# Altium PCB ratopus.PcbDoc (part 1 of 3)
Units mm, origin at the board's own origin, x right, y up, seen from the top; angles counter-clockwise.
Board outline 160 x 100 mm, 2 copper layers (Top Layer, Bottom Layer); 132 components, 69 nets, 422 pads, 0 vias.
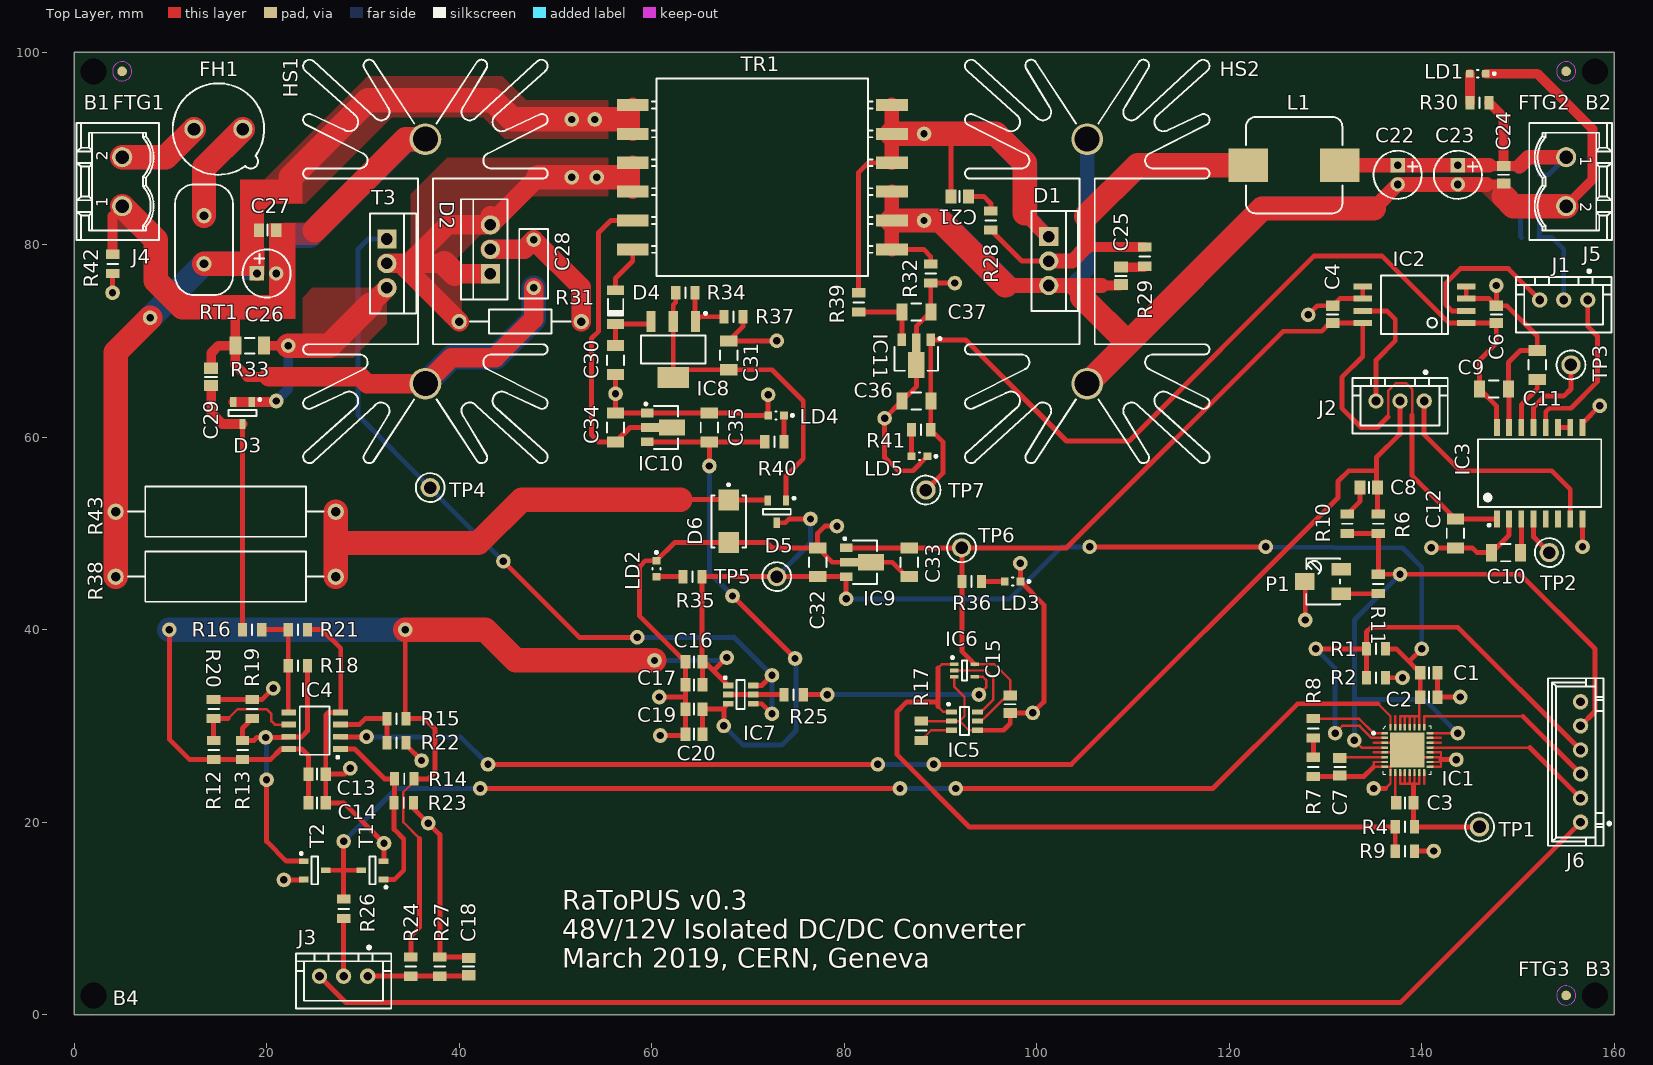
[diagram p0: Top Layer view]
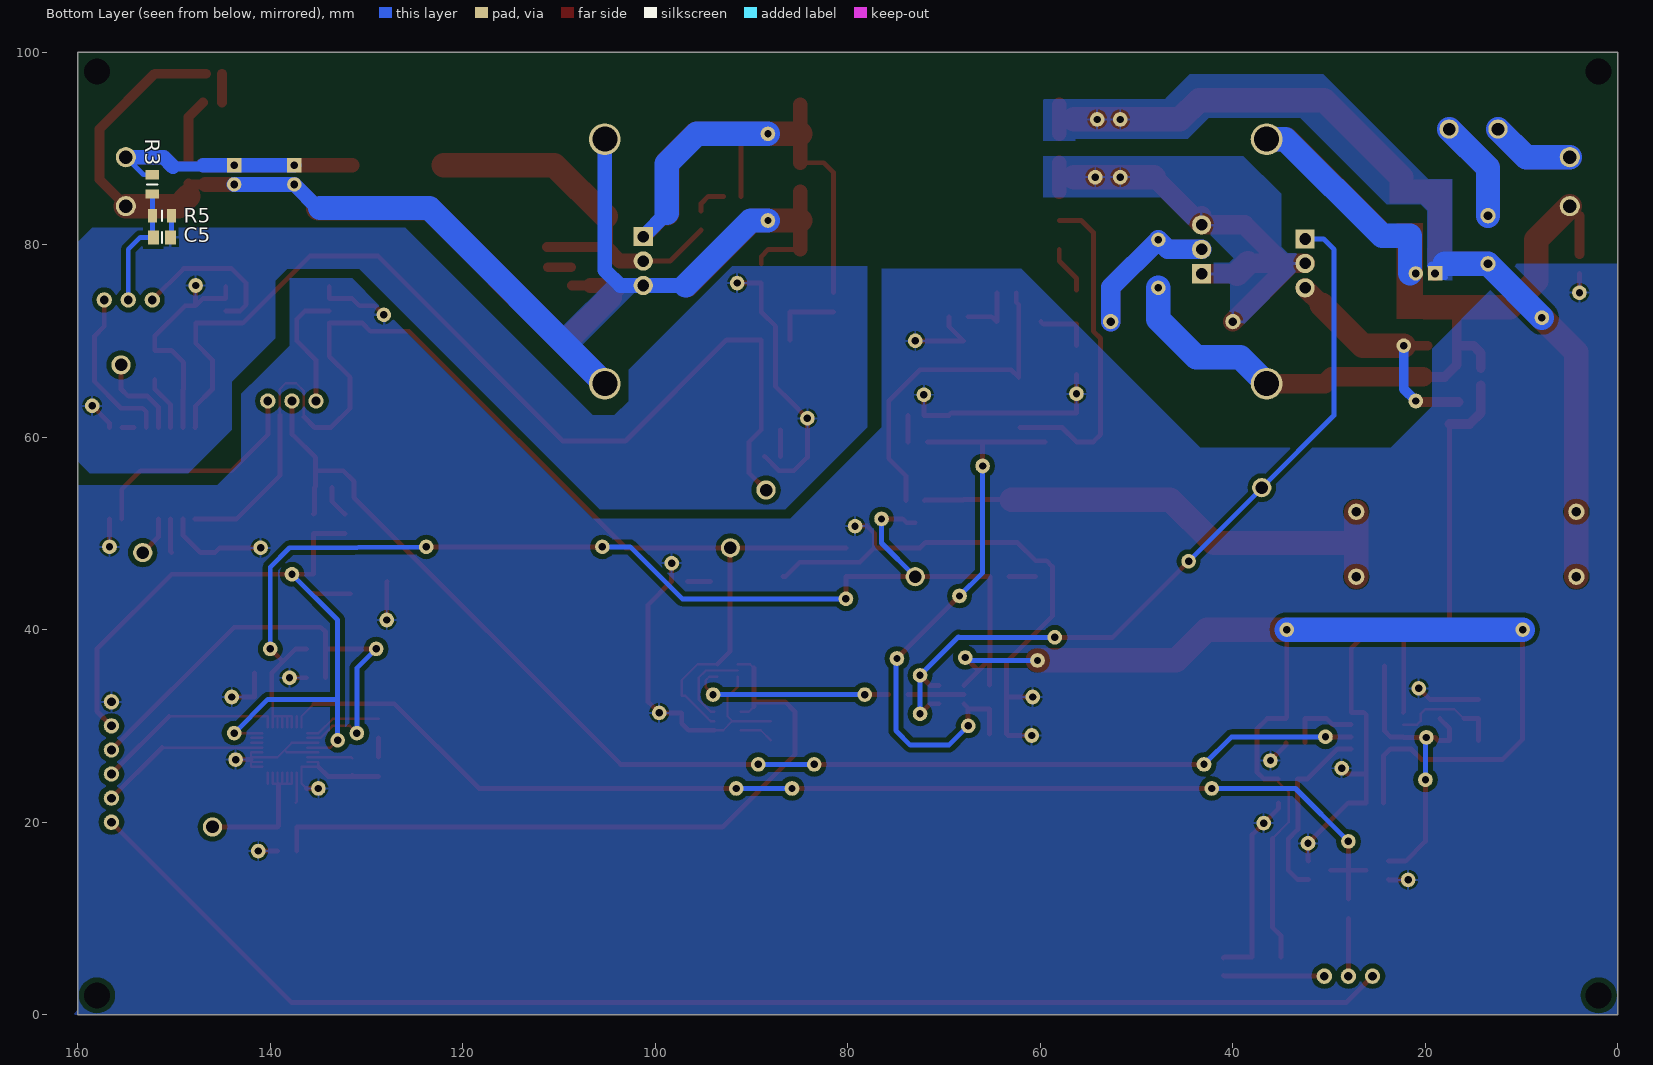
[diagram p1: Bottom Layer view, seen from below]
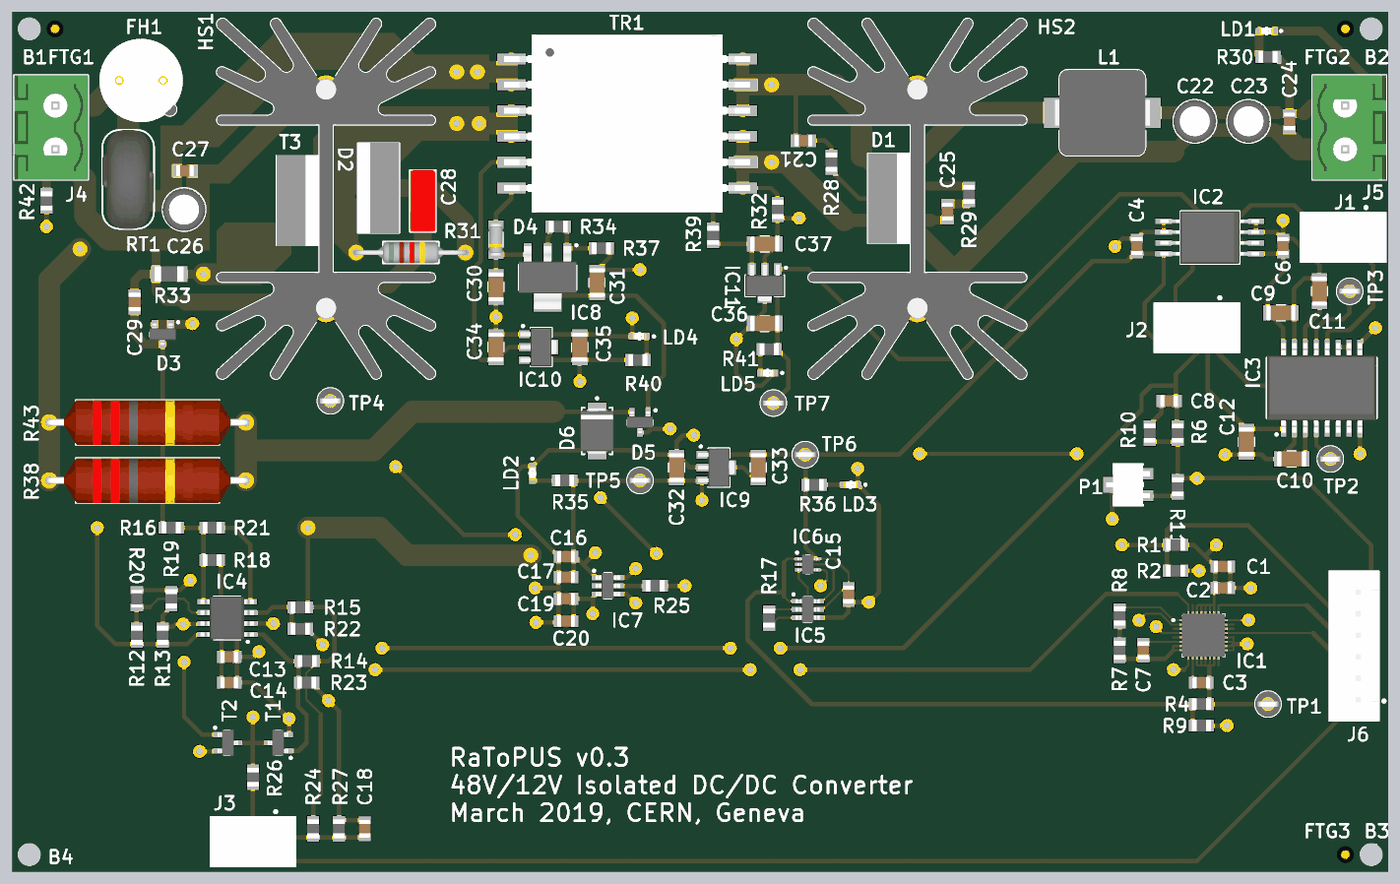
[diagram p3: 3D render of the assembled board from above, using the file's embedded part models]
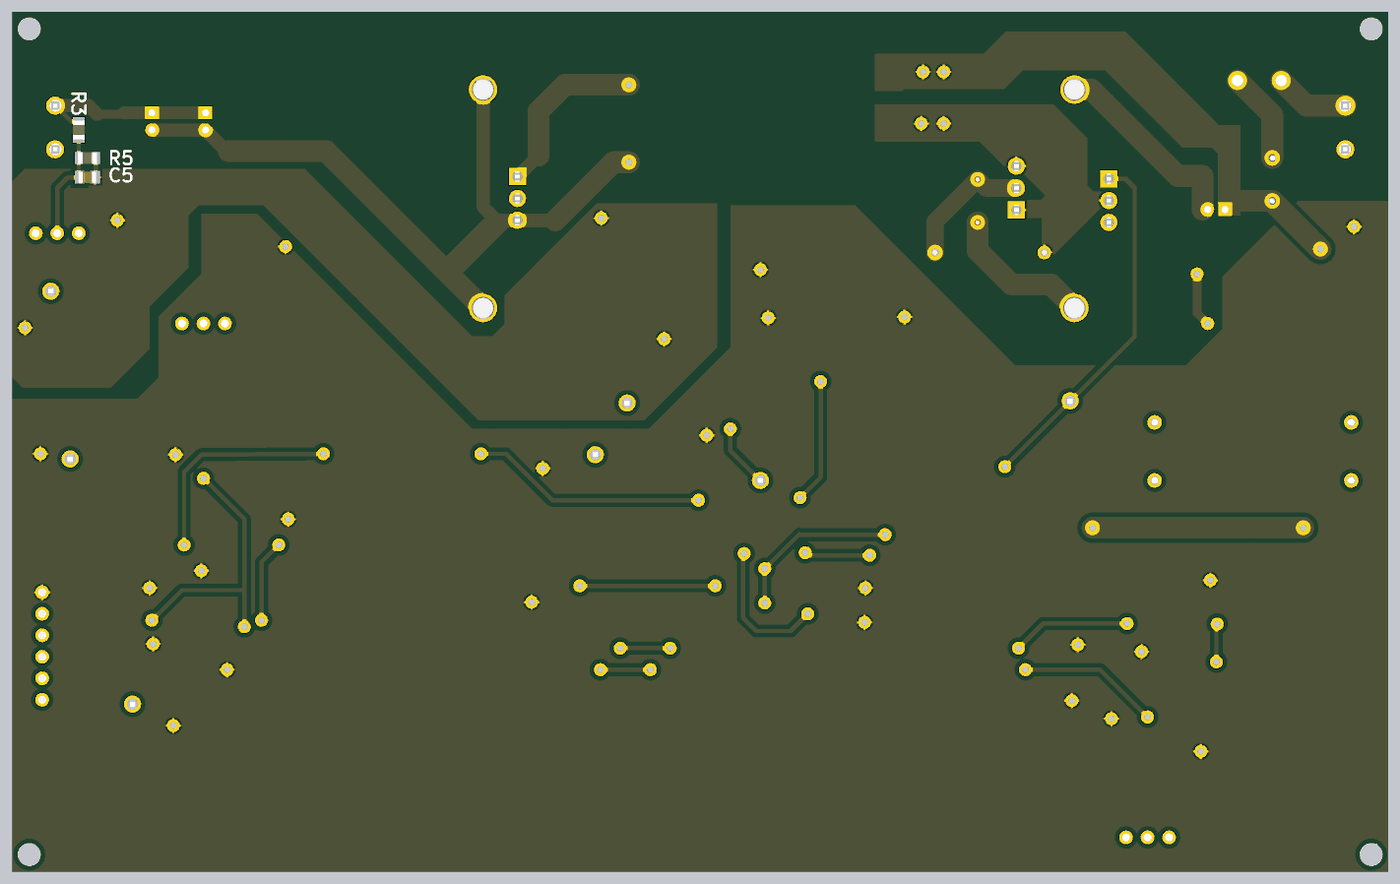
[diagram p4: 3D render of the assembled board from below, using the file's embedded part models]

## Layer stack, top to bottom
Top Solder: solder mask 0.0102, Solder Resist, Dk 3.5
Top Layer: signal copper 0.0356
Dielectric 1: dielectric 0.32, FR-4, Dk 4.8
Bottom Layer: signal copper 0.0356
Bottom Solder: solder mask 0.0102, Solder Resist, Dk 3.5

## Board outline
0,0 160,0 160,100 0,100

## Design rules (kind name [scope] priority, off if disabled: settings)
Clearance [All] p1: gap=0.25 ignorepadtopadclearanceinfootprint=TRUE except(0: Arc-Hole Track-Hole SMDPad-Hole THPad-Hole Via-Hole Fill-Hole Poly-Hole Region-Hole Text-Hole; 0.5: Arc-Poly Track-Poly SMDPad-Poly THPad-Poly Via-Poly Fill-Poly Poly-Poly)
Height [All] p1: minheight=0 maxheight=70 prefheight=12.7
HoleSize [All] p1: absolutevalues=TRUE maxlimit=3 minlimit=0.025 maxpercent=80.000 minpercent=20.000
MinimumSolderMaskSliver [All] p1: minsoldermaskwidth=0.03
PolygonConnect [All] p1: connectstyle=Relief reliefconductorwidth=0.254 reliefentries=4 polygonreliefangle="90 Angle" airgapwidth=0.254
RoutingVias [All] p1: holewidth=0.711 width=1.27 viastyle="Through Hole" minholewidth=0.711 minwidth=1.27 maxholewidth=0.711 maxwidth=1.27
SilkToSilkClearance [All] p1: silktosilkclearance=0.2
SilkToSolderMaskClearance [IsPad] p1: minsilkscreentomaskgap=0.1 clearancetoexposedcopper=TRUE
SolderMaskExpansion [All] p1: expansion=0.102
Width [All] p1: maxlimit=2.54 minlimit=0.25 preferedwidth=0.508 minimp=50.000000 maximp=50.000000 favimp=50.000000
25 further rules are at their usual default settings.

## Classes and differential pairs
component class ratopus: B1 B2 B3 B4 FH1 FTG1 FTG2 FTG3 J4 J5 J6 R42 RT1
component class U_controller: C1 C2 C3 C4 C5 C6 C7 C8 C9 C10 C11 C12 C13 C14 C15 C16 C17 C18 C19 C20 IC1 IC2 IC3 IC4 IC5 IC6 IC7 J1 J2 J3 P1 R1 R2 R3 R4 R5 R6 R7 R8 R9 R10 R11 R12 R13 R14 R15 R16 R17 R18 R19 R20 R21 R22 R23 R24 R25 R26 R27 T1 T2 TP1 TP2 TP3
component class U_power_stage: C21 C22 C23 C24 C25 C26 C27 C28 C29 C30 C31 C32 C33 C34 C35 C36 C37 D1 D2 D3 D4 D5 D6 HS1 HS2 IC8 IC9 IC10 IC11 L1 LD1 LD2 LD3 LD4 LD5 R28 R29 R30 R31 R32 R33 R34 R35 R36 R37 R38 R39 R40 R41 R43 T3 TP4 TP5 TP6 TP7 TR1

## Components (designator, comment, footprint, x,y, rotation, side; value= is the part's Value field where it differs from the comment)
B1 "Non Plated Hole" MTG270 2,98 r0 top
B2 "Non Plated Hole" MTG270 158,98 r0 top
B3 "Non Plated Hole" MTG270 158,2 r0 top
B4 "Non Plated Hole" MTG270 2,2 r0 top
C1 "4.7uF" CAPC2012X135N 140.75,35.5 r180 top
C2 "100nF" CAPC2012X135N 140.75,33 r180 top
C3 "220nF" CAPC2012X135N 138.25,22 r180 top
C4 "100nF" CAPC2012X135N 130.75,72.75 r270 top
C5 "100pF" CAPC2012X88N 151.25,80.75 r0 bottom
C6 "100nF" CAPC2012X135N 147.75,72.75 r270 top
C7 "220nF" CAPC2012X135N 131.5,25.75 r90 top
C8 "33pF" CAPC2012X88N 134.5,54.75 r0 top
C9 "1uF" CAPC3216X140N 147.5,65 r180 top
C10 "1uF" CAPC3216X140N 148.75,48 r0 top
C11 "1uF" CAPC3216X140N 152,67.5 r270 top
C12 "1uF" CAPC3216X140N 143.5,50 r90 top
C13 "100nF" CAPC2012X135N 25.25,25 r180 top
C14 "100nF" CAPC2012X135N 25.25,22 r180 top
C15 "100nF" CAPC2012X135N 97.25,32.25 r90 top
C16 "4.7uF" CAPC2012X135N 64.4,36.65 r0 top
C17 "100nF" CAPC2012X135N 64.4,34.25 r0 top
C18 "100nF" CAPC2012X135N 41,5 r270 top
C19 "4.7uF" CAPC2012X135N 64.4,31.75 r0 top
C20 "100nF" CAPC2012X135N 64.4,29.15 r0 top
C21 "47pF" CAPC2012X88N 92,85 r0 top
C22 "22uF" CAPPR200-500X700 137.5,87.25 r270 top
C23 "22uF" CAPPR200-500X700 143.75,87.25 r270 top
C24 "100nF" CAPC2012X135N 148.5,87.25 r90 top
C25 "47pF" CAPC2012X88N 108.75,76.75 r90 top
C26 "10uF" CAPPR200-500X1100 20,77 r0 top
C27 "100nF" CAPC2012X135N 20.1,81.5 r180 top
C28 "1nF" CAPR500-300X720X750 47.75,78 r90 top
C29 "1nF" CAPC2013X100N 14.25,66.25 r270 top
C30 "1uF" CAPC3216X140N 56.25,68 r90 top
C31 "1uF" CAPC3216X140N 68,68.5 r270 top
C32 "1uF" CAPC3216X140N 77.25,47 r270 top
C33 "1uF" CAPC3216X140N 86.75,47 r90 top
C34 "1uF" CAPC3216X140N 56.25,61 r90 top
C35 "1uF" CAPC3216X140N 66,61 r270 top
C36 "1uF" CAPC3216X140N 87.5,63.75 r0 top
C37 "1uF" CAPC3216X140N 87.5,73 r180 top
D1 "MBR20200CT" TO-220-V 101.25,78.29 r270 top
D2 "MBR10200CT" TO-220-V 43.25,79.5 r90 top
D3 "BAT54C" SOT95P240X130-3N 17.5,62.5 r270 top
D4 "PMLL4148L" DIOMELF3515N 56.25,73.5 r90 top
D5 "BAT54C" SOT95P240X130-3N 73,52.25 r270 top
D6 "1SMB5924BT3G" DIOM5436X244N 68,51.25 r270 top
FH1 "Fuse Holder" FUSH_SCHURTER_0031.7601 15,92 r0 top
FTG1 "Use only in PCB" FIDUCIAL_TOP_C100-200 5,98 r90 top
FTG2 "Use only in PCB" FIDUCIAL_TOP_C100-200 155,98 r90 top
FTG3 "Use only in PCB" FIDUCIAL_TOP_C100-200 155,2 r90 top
HS1 "Heat Sink 2 Pads" HSINK_AAVID-THERMALLOY_530002B02500G_v 36.5,78.25 r90 top
HS2 "Heat Sink 2 Pads" HSINK_AAVID-THERMALLOY_530002B02500G_v 105.25,78.25 r90 top
IC1 "CERN_FEAST2.1" CERN_FEAST2.1 138.5,27.5 r0 top
IC2 "ACPL-C87B-000E" AVAGO_ACPL-C87B 139.25,73.75 r180 top
IC3 "ADuM4190ARIZ" SOIC127P1031X264-16N 152.25,56.25 r90 top
IC4 "LM293D" SOIC127P600X175-8N 25,29.5 r180 top
IC5 "LTC6993CS6-1#TRPBF" SOT95P280X100-6N 92.5,30.5 r0 top
IC6 "74AHC1G08GW" SOT65P212X110-5N 92.5,35.75 r0 top
IC7 "ZXGD3003E6TA" SOT95P285X140-6N 69.25,33.25 r0 top
IC8 "LM317EMP" SOT230P700X180-4N 62.25,69.1 r270 top
IC9 "L78L05ACUTR" SOT89 82.165,47 r0 top
IC10 "L79L05ACUTR" SOT89 61.5,61 r0 top
IC11 "L78L05ACUTR" SOT89 87.5,68.135 r270 top
J1 "Header 3" JST_B3B-XH-A(LF)(SN) 154.75,74.25 r180 top
J2 "Header 3" JST_B3B-XH-A(LF)(SN) 137.75,63.75 r180 top
J3 "Header 3" JST_B3B-XH-A(LF)(SN) 28,4 r180 top
J4 "Family" PHOENIX_1755736 5,86.54 r90 top
J5 "Family" PHOENIX_1755736 155,86.54 r270 top
J6 "Header 6" JST_B6B-XH-A(LF)(SN) 156.5,26.25 r90 top
L1 "10uH" IND_BOURNS_SRP1038A 126.75,88.25 r0 top
LD1 "Blue" LED_KINGBRIGHT_KPH-1608QBC-D 145.825,97.75 r180 top
LD2 "Green" LED_KINGBRIGHT_KPH-1608CGCK 60.5,46.325 r270 top
LD3 "Green" LED_KINGBRIGHT_KPH-1608CGCK 97.5,45 r180 top
LD4 "Green" LED_KINGBRIGHT_KPH-1608CGCK 72.925,62.25 r180 top
LD5 "Blue" LED_KINGBRIGHT_KPH-1608QBC-D 87.825,58 r180 top
P1 "100k" TRIM_VISHAY_TSM4YL 129.75,45 r90 top
R1 "220k" RESC2012X60N 135.25,38 r0 top
R2 "100k" RESC2012X60N 135.25,35 r180 top
R3 "18k" RESC2012X60N 152.25,86.25 r90 bottom
R4 "10k" RESC2012X60N 138.25,19.5 r180 top
R5 "3k3" RESC2012X60N 151.25,83 r0 bottom
R6 "1M" RESC2012X60N 135.5,51 r90 top
R7 "220k" RESC2012X60N 128.75,25.75 r90 top
R8 "390k" RESC2012X60N 128.75,29.75 r90 top
R9 "10k" RESC2012X60N 138.25,17 r180 top
R10 "3k3" RESC2012X60N 132.25,51 r90 top
R11 "390k" RESC2012X60N 135.5,44.75 r270 top
R12 "68k" RESC2012X60N 14.5,27.5 r270 top
R13 "20k" RESC2012X60N 17.5,27.5 r270 top
R14 "20k" RESC2012X60N 34.3,24.5 r0 top
R15 "33k" RESC2012X60N 33.5,30.75 r0 top
R16 "220k" RESC2012X60N 18.5,40 r0 top
R17 "59k" RESC2012X60N 88,29.5 r270 top
R18 "10M" RESC2012X60N 23.25,36.25 r0 top
R19 "10k" RESC2012X60N 18.5,31.75 r270 top
R20 "2k" RESC2013X64N 14.5,31.75 r270 top
R21 "220k" RESC2012X60N 23.25,40 r180 top
R22 "9k1" RESC2012X60N 33.5,28.25 r180 top
R23 "10k" RESC2012X60N 34.25,22 r180 top
R24 "220k" RESC2012X60N 35,5 r90 top
R25 "180" RESC2012X60N 74.75,33.25 r180 top
R26 "10k" RESC2012X60N 28,11 r90 top
R27 "100k" RESC2012X60N 38,5 r270 top
R28 "33" RESC2012X60N 95.25,82.5 r270 top
R29 "33" RESC2012X60N 111.25,78.75 r90 top
R30 "820" RESC2012X60N 146,94.75 r0 top
R31 "15" RES1270-650X250 46.35,72 r0 top
R32 "0" RESC2012X60N 89,77 r90 top
R33 "0R05" RESC3216X80N 18.25,69.5 r0 top
R34 "680" RESC2012X60N 63.5,75 r180 top
R35 "820" RESC2012X60N 64.25,45.5 r0 top
R36 "330" RESC2012X60N 93.25,45 r180 top
R37 "4k7" RESC2012X60N 68.5,72.5 r180 top
R38 "680" RES2286-1670X520 15.75,45.5 r0 top
R39 "1k" RESC2012X60N 81.5,74 r270 top
R40 "330" RESC2012X60N 72.75,59.5 r180 top
R41 "100" RESC2012X60N 88,60.75 r0 top
R42 "0" RESC2012X60N 4,78 r90 top
R43 "680" RES2286-1670X520 15.75,52.25 r0 top
RT1 "10R" THERM_TDK_B57236S0 13.5,80.5 r270 top
T1 "BSH103" SOT95P230X110-3N 31,15 r180 top
T2 "BSH103" SOT95P230X110-3N 25,15 r0 top
T3 "IRF634" TO-220-V 32.5,78.04 r270 top
TP1 "Test Point" VERO_20-2136 146,19.5 r0 top
TP2 "Test Point" VERO_20-2136 153.25,48 r0 top
TP3 "Test Point" VERO_20-2136 155.5,67.5 r0 top
TP4 "Test Point" VERO_20-2136 37,54.75 r0 top
TP5 "Test Point" VERO_20-2136 73,45.5 r0 top
TP6 "Test Point" VERO_20-2136 92.2,48.5 r0 top
TP7 "Test Point" VERO_20-2136 88.5,54.5 r0 top
TR1 "2:1:1" XFMR_COILCRAFT_POE600F 71.5,87 r0 top

## Footprints (in the part's own frame and the unit in brackets; to place one, negate y for a bottom-side part, rotate by r counter-clockwise, add the part's x,y. Pads: shape width x height; smd on the part's side, far side on the other; paste and mask are expansions set on the pad)
AVAGO_ACPL-C87B [mm] "8-Leads Stretched Surface Mount SO Package, Body 6.807x5.859mm, Pitch 1.27mm"
  rect 1.905x0.64 smd: 1(-5.372,1.905) 2(-5.372,0.635) 3(-5.372,-0.635) 4(-5.372,-1.905) 5(5.373,-1.905) 6(5.373,-0.635) 7(5.373,0.635) 8(5.373,1.905)
  silkscreen extent -3.47,-3.05 3.47,3.05, body extent -5.75,-3.05 5.75,3.05, height 3.61
CAPC2012X88N [mm] "Chip Capacitor, Body 2.0x1.25mm, IPC Medium Density"
  rect 1.15x1.45 smd: 1(-0.9,0) 2(0.9,0)
  silkscreen extent 0,-0.58 0,0.58, body extent -1.05,-0.67 1.05,0.68, height 0.9
CAPC2012X135N [mm] "Chip Capacitor, Body 2.0x1.25mm, IPC Medium Density"
  rect 1.05x1.4 smd: 1(-0.9,0) 2(0.9,0)
  silkscreen extent 0,-0.58 0,0.58, body extent -1.05,-0.67 1.05,0.68, height 1.25
CAPC2013X100N [mm] "Capacitor, Non-Polarized, Chip; 2.00mm L X 1.25mm W X 0.9mm H, IPC Medium Density"
  rect 1.15x1.45 smd: 1(-0.9,0) 2(0.9,0)
  silkscreen extent 0,-0.63 0,0.63, body extent -1.1,-0.72 1.1,0.73, height 1
CAPC3216X140N [mm] "Chip Capacitor, Body 3.2x1.6mm, IPC Medium Density"
  rect 1.15x1.8 smd: 1(-1.5,0) 2(1.5,0)
  silkscreen extent -0.5,-0.9 0.5,0.9, body extent -1.7,-0.9 1.7,0.9, height 1.4
CAPPR200-500X700 [mm] "Capacitor, Radial, Pin spacing 2.0mm - Body Diameter 5.0mm X Body Height 7mm"
  rect 1.5x1.5 hole 0.8: 1(-1,0)
  round 1.5 hole 0.8: 2(1,0)
  silkscreen extent -2.5,-2.5 2.5,2.5, body extent -2.51,-2.51 2.49,2.49, height 7
CAPPR200-500X1100 [mm] "Capacitor, Radial, Pin spacing 2.0mm - Body Diameter 5.0mm X Body Height 11mm"
  rect 1.5x1.5 hole 0.8: 1(-1,0)
  round 1.5 hole 0.8: 2(1,0)
  silkscreen extent -2.5,-2.5 2.5,2.5, body extent -2.51,-2.51 2.49,2.49, height 10.9
CAPR500-300X720X750 [mm] "Capacitor Radial, Pin spacing 5.0mm - Body With 3.0mm X Body Length 7.2mm X Body Height 7.5mm"
  round 1.5 hole 0.8: 1(-2.5,0) 2(2.5,0)
  silkscreen extent -3.6,-1.5 3.6,1.5, body extent -3.6,-1.5 3.6,1.5, height 7.5
CERN_FEAST2.1 [mm] "QFN, 0.50mm Pitch, Square; 8 Pin X 8 Pin, 5mm X 5mm X 0.9mm H Body (w/Thermal Tab 3.6 X 3.6mm)"
  rrect30% 0.7x0.25 smd: 1(-2.35,1.75) 2(-2.35,1.25) 3(-2.35,0.75) 4(-2.35,0.25) 5(-2.35,-0.25) 6(-2.35,-0.75) 7(-2.35,-1.25) 8(-2.35,-1.75) 17(2.35,-1.75) 18(2.35,-1.25) 19(2.35,-0.75) 20(2.35,-0.25) 21(2.35,0.25) 22(2.35,0.75) 23(2.35,1.25) 24(2.35,1.75)
  rrect30% 0.25x0.7 smd: 9(-1.75,-2.35) 10(-1.25,-2.35) 11(-0.75,-2.35) 12(-0.25,-2.35) 13(0.25,-2.35) 14(0.75,-2.35) 15(1.25,-2.35) 16(1.75,-2.35) 25(1.75,2.35) 26(1.25,2.35) 27(0.75,2.35) 28(0.25,2.35) 29(-0.25,2.35) 30(-0.75,2.35) 31(-1.25,2.35) 32(-1.75,2.35)
  rect 3.6x3.6 smd: 33(0,0)
  silkscreen extent -3.62,-2.5 2.5,2.5, body extent -2.5,-2.5 2.5,2.5, height 0.9
DIOM5436X244N [mm] "DO-214-AA/SMB Diode, Molded Body; 5.40mm L X 3.62mm W X 2.44mm H, IPC Medium Density"
  rect 2.2x2.15 smd: 1(-2.2,0) 2(2.2,0)
  silkscreen extent -3.92,-1.8 2.7,1.8, body extent -2.7,-1.95 2.7,1.95, height 2.44
DIOMELF3515N [mm] "SOD80C, MELF Diode, 2-Leads, Body 3.5x1.5mm, IPC Medium Density"
  rect 1x1.75 smd: 1(-1.75,0) 2(1.75,0)
  silkscreen extent -0.85,-0.8 0.85,0.8, body extent -1.85,-0.8 1.85,0.8, height 1.6
FIDUCIAL_TOP_C100-200 [mm] "Round Fiducial Target, Top Layer, 1.0mm, Top Solder 2.0mm, Keepout =2.0mm"
  round 1 smd paste-0.51 mask+0.5: FTG2(0,0)
  Top Layer keep-out circle w0.1: c0,0 r1
FUSH_SCHURTER_0031.7601 [mm] "Vertical Fuse Holder For D8.5x H 8.5mm Subminiature Fuses"
  round 2 hole 1.3: 1(-2.54,0) 2(2.54,0)
  silkscreen extent -4.75,-4.75 4.75,4.75, body extent -4.75,-4.75 4.75,4.75, height 4.4
HSINK_AAVID-THERMALLOY_530002B02500G_v [mm] "TO-220, Extruded Heatsinks Rth: 2.6K/W  - Vertical Mount - Height 63.5mm"
  round 3.3 hole 2.6: 1(-12.7,0) 2(12.7,0)
  silkscreen extent -20.96,-12.7 20.96,12.7, body extent -20.95,-12.7 20.95,12.7, height 63.5
IND_BOURNS_SRP1038A [mm] "SMD Inductor Body Width 10mm Body Lenght 10mm Height 4mm"
  rect 4.1x3.5 smd: 1(-4.75,0) 2(4.75,0)
  silkscreen extent -5,-5 5,5, body extent -5.5,-5 5.5,5, height 4
JST_B3B-XH-A(LF)(SN) [mm] "2.5mm Pitch, 3 Contacts Top Entry Type Shrouded Header"
  round 1.6 hole 0.9: 1(-2.5,0) 2(0,0) 3(2.5,0)
  silkscreen extent -4.95,-3.13 4.95,3.38, body extent -4.95,-2.37 4.95,3.38, height 7
JST_B6B-XH-A(LF)(SN) [mm] "2.5mm Pitch, 6 Contacts Top Entry Type Shrouded Header"
  round 1.6 hole 0.9: 1(-6.25,0) 2(-3.75,0) 3(-1.25,0) 4(1.25,0) 5(3.75,0) 6(6.25,0)
  silkscreen extent -8.7,-3.13 8.7,3.38, body extent -8.7,-2.37 8.7,3.38, height 7
LED_KINGBRIGHT_KPH-1608CGCK [mm] "SMT Green LED, Case 0603, Body L 1.6 x W 0.8mm H 0.65mm"
  rect 0.8x0.8 smd: 1(-0.825,0) 2(0.825,0)
  silkscreen extent -1.82,-0.4 0.08,0.4, body extent -0.8,-0.4 0.8,0.4, height 0.65
LED_KINGBRIGHT_KPH-1608QBC-D [mm] "SMT Blue LED, Case 0603, Body L 1.6 x W 0.8mm H 0.65mm"
  rect 0.8x0.8 smd: 1(-0.825,0) 2(0.825,0)
  silkscreen extent -1.83,-0.4 0.08,0.4, body extent -0.8,-0.4 0.8,0.4, height 0.65
MTG270 [mm] "Non Plated Through Hole: Hole Dia.=2.7mm"
  round 0.5 hole 2.7 unplated mask+1.1: 1(0,0)
PHOENIX_1755736 [mm] "PCB Header, 12A 250 V, Pitch: 2.54mm, 2 Positions, MSTBVA Serie"
  round 2.1 hole 1.4: 1(-2.54,0) 2(2.54,0)
  silkscreen extent -6.08,-3.84 6.08,4.77, body extent -6.08,-3.83 6.08,4.77, height 12
RES1270-650X250 [mm] "Resistor, Axial, Pad spacing 10.16 mm - Body Lengh 6.6mm X Body Diameter 2.5mm"
  round 1.6 hole 0.9: 1(-6.35,0) 2(6.35,0)
  silkscreen extent -5.2,-1.25 5.2,1.25, body extent -6.65,-1.25 6.65,1.25, height 2.5
RES2286-1670X520 [mm] "Resistor, Axial, Pad spacing 22.86 mm - Body Lengh 16.7mm X Body Diameter 5.2mm"
  round 1.7 hole 1: 1(-11.43,0) 2(11.43,0)
  silkscreen extent -10.16,-2.6 10.16,2.6, body extent -11.82,-2.6 11.82,2.6, height 5.2
RESC2012X60N [mm] "Chip Resistor, EIA 0805, Metric 2012, Body 2.0x1.2mm, IPC Medium Density"
  rect 0.95x1.4 smd: 1(-1,0) 2(1,0)
  silkscreen extent 0,-0.55 0,0.55, body extent -1.1,-0.67 1.1,0.68, height 0.6
RESC2013X64N [mm] "Chip Resistor, EIA 0805, Metric 2013, Body 2.03x1.27mm, IPC Medium Density"
  rect 0.95x1.45 smd: 1(-1,0) 2(1,0)
  silkscreen extent 0,-0.55 0,0.55, body extent -1.02,-0.63 1.02,0.64, height 0.64
RESC3216X80N [mm] "Chip Resistor, EIA 1206, Metric 3216, Body 3.2x1.6mm, IPC Medium Density"
  rect 1.25x1.85 smd: 1(-1.5,0) 2(1.5,0)
  silkscreen extent -0.5,-0.8 0.5,0.8, body extent -1.67,-0.87 1.68,0.88, height 0.8
SOIC127P600X175-8N [mm] "SOIC 8, Pitch 1.27mm - Body 4x5mm, IPC Medium Density"
  rect 1.55x0.6 smd: 1(-2.7,1.905) 2(-2.7,0.635) 3(-2.7,-0.635) 4(-2.7,-1.905) 5(2.7,-1.905) 6(2.7,-0.635) 7(2.7,0.635) 8(2.7,1.905)
  silkscreen extent -2.53,-2.5 1.55,2.88, body extent -3.1,-2.5 3.1,2.5, height 1.75
SOIC127P1031X264-16N [mm] "SOIC, 1.27mm Pitch;16 Pin, 7.49mm W X 10.21mm L X 2.64mm H body, IPC Medium Density"
  rect 1.8x0.6 smd: 1(-4.75,4.445) 2(-4.75,3.175) 3(-4.75,1.905) 4(-4.75,0.635) 5(-4.75,-0.635) 6(-4.75,-1.905) 7(-4.75,-3.175) 8(-4.75,-4.445) 9(4.75,-4.445) 10(4.75,-3.175) 11(4.75,-1.905) 12(4.75,-0.635) 13(4.75,0.635) 14(4.75,1.905) 15(4.75,3.175) 16(4.75,4.445)
  silkscreen extent -5.52,-6.4 3.52,6.4, body extent -5.21,-6.37 5.21,6.38, height 2.65
SOT65P212X110-5N [mm] "SOT353, SOT, 0.65mm Pitch, 5 pin, 1.25mm W X 2.05mm L X 1.10mm H, IPC Medium Density"
  rect 0.9x0.4 smd: 1(-1.05,0.65) 2(-1.05,0) 3(-1.05,-0.65) 4(1.05,-0.65) 5(1.05,0.65)
  silkscreen extent -1.37,-1.05 0.28,1.47, body extent -1.2,-1.1 1.2,1.1, height 1.1
SOT89 [mm] "SOT89-3, 3-Leads, Body 2.48x4.5mm"
  rect 1.3x0.9 smd: 1(-1.965,1.5) 3(-1.965,-1.5)
  rect 1.9x0.9 smd: 2(-1.665,0)
  rect 2.7x1.7 smd: 2(0.635,0)
  silkscreen extent -2.22,-2.25 1.24,2.57, body extent -2.44,-2.25 1.81,2.25, height 1.6
SOT95P230X110-3N [mm] "SOT23, 3 pin, Pitch 0.95mm - 1.3mm W X 2.9mm L X 1.1mm H, IPC Medium Density"
  rect 1x0.6 smd: 1(-1.15,0.95) 2(-1.15,-0.95) 3(1.15,0)
  silkscreen extent -1.53,-1.45 0.33,1.87, body extent -1.08,-1.5 1.25,1.5, height 1.1
SOT95P240X130-3N [mm] "SOT23 3-Leads, Pitch 0.95mm - Body 1.3x2.9mm, IPC Medium Density"
  rect 1.05x0.65 smd: 1(-1.15,0.95) 2(-1.15,-0.95) 3(1.15,0)
  silkscreen extent -1.52,-1.45 0.3,1.92, body extent -1.25,-1.5 1.25,1.5, height 1.3
SOT95P280X100-6N [mm] "SOT23, 0.95mm pitch; 6 pin, 1.625mm W X 2.90mm L X 1.00mm H body, IPC Medium Density"
  rect 1.1x0.55 smd: 1(-1.35,0.95) 2(-1.35,0) 3(-1.35,-0.95) 4(1.35,-0.95) 5(1.35,0) 6(1.35,0.95)
  silkscreen extent -1.77,-1.45 0.48,1.87, body extent -1.4,-1.5 1.4,1.5, height 1
SOT95P285X140-6N [mm] "SOT23, 0.95mm Pitch; 6 Pin, 1.60mm W X 3.00mm L X 1.40mm H Body, IPC Medium Density"
  rect 1.1x0.6 smd: 1(-1.3,0.95) 2(-1.3,0) 3(-1.3,-0.95) 4(1.3,-0.95) 5(1.3,0) 6(1.3,0.95)
  silkscreen extent -1.72,-1.5 0.43,1.87, body extent -1.42,-1.5 1.43,1.5, height 1.4
SOT230P700X180-4N [mm] "SOT223, 2.30mm pitch; 3 pin, 3.70mm W X 6.70mm L, IPC Medium Density"
  rect 2.15x0.95 smd: 1(-2.9,2.3) 2(-2.9,0) 3(-2.9,-2.3)
  rect 2.15x3.25 smd: 4(2.9,0)
  silkscreen extent -3.87,-3.35 1.45,3.48, body extent -3.65,-3.35 3.65,3.35, height 1.81
THERM_TDK_B57236S0 [mm] "NTC thermistors for Inrush Current Limiting, Body  D 11.5mm x W 6mm x H 16mm"
  round 1.6 hole 0.9: 1(-2.5,0) 2(2.5,0)
  silkscreen extent -5.75,-3 5.75,3, body extent -5.75,-3 5.75,3, height 16
TO-220-V [mm] "TO-220 3-Terminal - Vertical Mount"
  rect 2x2 hole 1.2: 1(-2.54,0)
  round 2 hole 1.2: 2(0,0) 3(2.54,0)
  silkscreen extent -5.21,-1.78 5.21,3.05, body extent -5.27,-1.75 5.27,2.95, height 20.5
TRIM_VISHAY_TSM4YL [mm] "W 3.5 x L 4.8 x H 5.3mm Trimming Potentiometer Serie TSM4YL"
  rect 1.3x2 smd: 1(-1.27,-1.9) 3(1.27,-1.9)
  rect 1.8x2 smd: 2(0,1.9)
  silkscreen extent -2.4,-1.75 2.4,1.75, body extent -2.4,-2.55 2.4,2.55, height 5.1
VERO_20-2136 [mm] "Black Bead PCB Terminal Test Pin (1.32 mm hole)"
  round 2 hole 1.3: 1(0,0)
  silkscreen extent -1.5,-1.5 1.5,1.5, body extent -1.5,-1.5 1.5,1.5, height 5.4
XFMR_COILCRAFT_POE600F [mm] "60 W PoE Transformer, Body  20.57 x 21.96mm"
  rect 3.3x1.27 smd: 1(-13.46,7.5) 2(-13.46,4.5) 3(-13.46,1.5) 4(-13.46,-1.5) 5(-13.46,-4.5) 6(-13.46,-7.5) 7(13.46,-7.5) 8(13.46,-4.5) 9(13.46,-1.5) 10(13.46,1.5) 11(13.46,4.5) 12(13.46,7.5)
  silkscreen extent -11.46,-10.25 11.46,10.26, body extent -14.32,-10.28 14.33,10.29, height 11.43

## Part data
B1 B2 B3 B4: library part NON-PLATED_HOLE2.7, "Single Terminal Socket", Author="CERN DEM BC", ComponentHeight=0mm, Component Type="Standard (No BOM)", CreateDate=11/11/2015, Family="Non Plated Hole", HelpURL=Undefined, LatestRevisionDate=11/11/2015, Mounted=No, PackageDescription="Non Plated Through Hole: Hole Dia.=2.7mm", Part Description="Non Plated Through Hole: Hole Dia.=2.7mm", Part Number=NON-PLATED_HOLE2.7, Pin Count=1, Sense=No, SMD=No, Socket=No, Status=None
C1 C16 C19: library part CC0805_4.7UF_16V_10%_X7R, "Non-polarised capacitor", Case=0805, Manufacturer=GENERIC, Manufacturer1 ComponentHeight=1.35mm, Manufacturer1 Example="TAIYO YUDEN", Manufacturer1 Part Number=EMK212B7475KG-T, Tolerance=±10%, Voltage=16V, Author="CERN DEM JLC", Component Type=Standard, CreateDate=16/09/2014, HelpURL=\\cern.ch\dfs\Applications\Altium\Datasheets\CC0805_X7R_TAIYO-YUDEN_HIGH-VALUE.pdf, LatestRevisionDate=16/09/2014, Manufacturer Part Number=CC0805_4.7UF_16V_10%_X7R, Mounted=Yes, Part Description="SMD Multilayer Chip Ceramic Capacitor", Part Number=CC0805_4.7UF_16V_10%_X7R, Pin Count=2, Sense=No, SMD=Yes, Socket=No, Status=Preferred, TC=X7R
C2 C4 C6 C13 C14 C15 C17 C18 C20 C24 C27: library part CC0805_100NF_50V_10%_X7R, "Non-polarised capacitor", Case=0805, Manufacturer=GENERIC, Manufacturer1 ComponentHeight=1mm, Manufacturer1 Example=TDK, Manufacturer1 Part Number=C2012X7R1H104K085AA, Tolerance=±10%, Voltage=50V, Author="CERN DEM JLC", Component Type=Standard, CreateDate=03/12/2007, HelpURL=\\cern.ch\dfs\Applications\Altium\Datasheets\CC0805_X7R_TDK_C.pdf, LatestRevisionDate=22/04/2015, Manufacturer Part Number=CC0805_100NF_50V_10%_X7R, Mounted=Yes, Part Description="SMD Multilayer Chip Ceramic Capacitor", Part Number=CC0805_100NF_50V_10%_X7R, Pin Count=2, Sense=No, SMD=Yes, Socket=No, Status=Preferred, TC=X7R
C3 C7: library part CC0805_220NF_50V_10%_X7R, "Non-polarised capacitor", Case=0805, Manufacturer=GENERIC, Manufacturer1 ComponentHeight=1.35mm, Manufacturer1 Example=MURATA, Manufacturer1 Part Number=GRM21BR71H224KA01L, Tolerance=±10%, Voltage=50V, Author="CERN DEM JLC", Component Type=Standard, CreateDate=03/12/2007, HelpURL=\\cern.ch\dfs\Applications\Altium\Datasheets\CC0805_X7R_MURATA.pdf, LatestRevisionDate=03/12/2007, Manufacturer Part Number=CC0805_220NF_50V_10%_X7R, Mounted=Yes, Part Description="SMD Multilayer Chip Ceramic Capacitor", Part Number=CC0805_220NF_50V_10%_X7R, Pin Count=2, Sense=No, SMD=Yes, Socket=No, Status=Preferred, TC=X7R
C5: library part CC0805_100PF_50V_5%_C0G_KEMET_C0805C101J5GACAUTO, "Non-polarised capacitor", Case=0805, Manufacturer=KEMET, Manufacturer Part Number=C0805C101J5GACAUTO, Tolerance=±5%, Voltage=50V, Author="CERN DEM BC", ComponentHeight=0.88mm, Component Type=Standard, CreateDate=26/02/2016, HelpURL=\\cern.ch\dfs\Applications\Altium\Datasheets\CC0805_KEMET_C0805C101J5GACAUTO.pdf, LatestRevisionDate=26/02/2016, Mounted=Yes, Part Description="SMD Multilayer Chip Ceramic Capacitor (Automotive Grade)", Part Number=CC0805_100PF_50V_5%_C0G_KEMET_C0805C101J5GACAUTO, Pin Count=2, Sense=No, SMD=Yes, Socket=No, Status="Not Recommended", TC=C0G/NP0
C8: library part CC0805_33PF_50V_5%_C0G_KEMET_C0805C330J5GACAUTO, "Non-polarised capacitor", Case=0805, Manufacturer=KEMET, Manufacturer Part Number=C0805C330J5GACAUTO, Tolerance=±5%, Voltage=50V, Author="CERN DEM BC", ComponentHeight=0.88mm, Component Type=Standard, CreateDate=29/02/2016, HelpURL=\\cern.ch\dfs\Applications\Altium\Datasheets\CC0805_KEMET_C0805C330J5GACAUTO.pdf, LatestRevisionDate=29/02/2016, Mounted=Yes, Part Description="SMD Multilayer Chip Ceramic Capacitor (Automotive Grade)", Part Number=CC0805_33PF_50V_5%_C0G_KEMET_C0805C330J5GACAUTO, Pin Count=2, Sense=No, SMD=Yes, Socket=No, Status="Not Recommended", TC=CG0/NP0
C9 C10 C11 C12 C30 C31 C32 C33 C34 C35 C36 C37: library part CC1206_1UF_50V_10%_X7R, "Non-polarised capacitor", Case=1206, Manufacturer=GENERIC, Manufacturer1 ComponentHeight=1.8mm, Manufacturer1 Example=KEMET, Manufacturer1 Part Number=C1206F105K5RACTU, Tolerance=±10%, Voltage=50V, Author="CERN DEM JLC", Component Type=Standard, CreateDate=07/11/2012, HelpURL=\\cern.ch\dfs\Applications\Altium\Datasheets\CC1206_X7R_KEMET_OPENMODE.pdf, LatestRevisionDate=07/11/2012, Manufacturer Part Number=CC1206_1UF_50V_10%_X7R, Mounted=Yes, Part Description="SMD Multilayer Chip Ceramic Capacitor", Part Number=CC1206_1UF_50V_10%_X7R, Pin Count=2, Sense=No, SMD=Yes, Socket=No, Status=Preferred, TC=X7R
C21 C25: library part CC0805_47PF_50V_5%_C0G_KEMET_C0805C470J5GACAUTO, "Non-polarised capacitor", Case=0805, Manufacturer=KEMET, Manufacturer Part Number=C0805C470J5GACAUTO, Tolerance=±5%, Voltage=50V, Author="CERN DEM JLC", ComponentHeight=0.88mm, Component Type=Standard, CreateDate=23/04/2015, HelpURL=\\cern.ch\dfs\Applications\Altium\Datasheets\CC0805_KEMET_C0805C470J5GACAUTO.pdf, LatestRevisionDate=23/04/2015, Mounted=Yes, Part Description="SMD Multilayer Chip Ceramic Capacitor (Automotive Grade)", Part Number=CC0805_47PF_50V_5%_C0G_KEMET_C0805C470J5GACAUTO, Pin Count=2, Sense=No, SMD=Yes, Socket=No, Status="Not Recommended", TC=CG0/NP0
C22 C23: library part CAER_22UF_25V_20%_200-500X700, "Polarised capacitor", Case="LS2 D5 x H7", Manufacturer=GENERIC, Manufacturer1 ComponentHeight=7mm, Manufacturer1 Example=PANASONIC, Manufacturer1 Part Number=EEAFC1E220, Tolerance=±20%, Voltage=25V, Author="CERN DEM JLC", ComponentHeight=7mm, Component Type=Standard, CreateDate=18/12/2007, HelpURL=\\cern.ch\dfs\Applications\Altium\Datasheets\CAER_PANASONIC_FC.pdf, LatestRevisionDate=18/12/2007, Manufacturer Part Number=CAER_22UF_25V_20%_200-500X700, Mounted=Yes, Part Description="Aluminum Electrolytic Capacitor", Part Number=CAER_22UF_25V_20%_200-500X700, Pin Count=2, Sense=No, SMD=No, Socket=No, Status=Preferred
C26: library part CAER_10UF_63V_20%_PANASONIC_ECA1JM100, "Polarised capacitor", Case="LS2 D5 x H11", Manufacturer=PANASONIC, Manufacturer Part Number=ECA1JM100, Tolerance=±20%, Voltage=63V, Author="CERN DEM JLC", ComponentHeight=11mm, Component Type=Standard, CreateDate=04/03/2009, HelpURL=\\cern.ch\dfs\Applications\Altium\Datasheets\CAER_PANASONIC_M.pdf, LatestRevisionDate=04/03/2009, Mounted=Yes, Part Description="Aluminum Electrolytic Capacitor (Series: M Type: A)", Part Number=CAER_10UF_63V_20%_PANASONIC_ECA1JM100, Pin Count=2, Sense=No, SMD=No, Socket=No, Status=None
C28: library part CPPR_1NF_400V_10%_WIMA_MKP2, "Non-polarised capacitor", Case="LS5 W3 x L7.2 x H7.5", Manufacturer=WIMA, Manufacturer Part Number=MKP2G011001B00KSSD, Tolerance=±10%, Voltage=400VDC, Author="CERN DEM MR", ComponentHeight=7.5mm, Component Type=Standard, CreateDate=28/08/2018, HelpURL=\\cern.ch\dfs\Applications\Altium\Datasheets\CPPR_WIMA_MKP2.pdf, LatestRevisionDate=28/08/2018, Mounted=Yes, Part Description="Metallized Polypropylene Film Capacitor (MKP2)", Part Number=CPPR_1NF_400V_10%_WIMA_MKP2, Pin Count=2, Sense=No, SMD=No, Socket=No, Status=None
C29: library part CC0805_1NF_25V_1%_C0G, "Non-polarised capacitor", Case=0805, Manufacturer=GENERIC, Manufacturer1 ComponentHeight=0.88mm, Manufacturer1 Example=KEMET, Manufacturer1 Part Number=C0805C102F3GACTU, Tolerance=±1%, Voltage=25V, Author="CERN DEM JLC", Component Type=Standard, CreateDate=11/03/2015, HelpURL="\\cern.ch\dfs\Applications\Altium\Datasheets\CC0805_C0G_KEMET_(Commercial Grade).pdf", LatestRevisionDate=11/03/2015, Manufacturer Part Number=CC0805_1NF_25V_1%_C0G, Mounted=Yes, Part Description="SMD Multilayer Chip Ceramic Capacitor", Part Number=CC0805_1NF_25V_1%_C0G, Pin Count=2, Sense=No, SMD=Yes, Socket=No, Status=None, TC=C0G/NP0
D1: library part MBR20200CT_v, "Dual Common Cathode Diodes", Case=TO-220-V, Manufacturer="ON SEMICONDUCTOR", Power=20A, Voltage=200V, Author="CERN DEM JLC", Bonding=No, ComponentHeight=19.85mm, Component Type=Standard, CreateDate=09/06/2015, Device=MBR20200CT, HelpURL=\\cern.ch\dfs\Applications\Altium\Datasheets\MBR20200CT.pdf, LatestRevisionDate=09/06/2015, Manufacturer Part Number=MBR20200CT, Mounted=Yes, PackageDescription="TO-220 3-Terminal - Vertical", Part Description="Switch-mode Power Rectifier (Common Cathode)", Part Number=MBR20200CT_v, Pin Count=3, PressFit=No, Sense=No, SMD=No, Socket=No
D2: library part MBR20200CT_v, "Dual Common Cathode Diodes", Case=TO-220-V, Manufacturer="ON SEMICONDUCTOR", Part Number=MBR10200CT_v, Power=20A, Voltage=200V, Author="CERN DEM JLC", Bonding=No, ComponentHeight=19.85mm, Component Type=Standard, CreateDate=09/06/2015, Device=MBR10200CT, HelpURL=\\cern.ch\dfs\Applications\Altium\Datasheets\MBR20200CT.pdf, LatestRevisionDate=09/06/2015, Manufacturer Part Number=MBR10200CT, Mounted=Yes, PackageDescription="TO-220 3-Terminal - Vertical", Part Description="Switch-mode Power Rectifier (Common Cathode)", Pin Count=3, PressFit=No, Sense=No, SMD=No, Socket=No
D3 D5: "Dual Common Cathode Schottky Diodes", Case=SOT23-3, Manufacturer="FAIRCHILD SEMICONDUCTOR", Power=200mA, Voltage=30V, Author="CERN DEM JLC", Bonding=No, ComponentHeight=1.30mm, Component Type=Standard, CreateDate=17/09/2009, Device=BAT54C, HelpURL=\\cern.ch\dfs\Applications\Altium\Datasheets\BAT54C.pdf, LatestRevisionDate=27/05/2010, Manufacturer Part Number=BAT54C, Mounted=Yes, PackageDescription="SOT23 3-Leads, Pitch 0.95mm - Body 1.3x2.9mm, IPC Medium Density", Part Description="Dual Common Cathode Small Signal Schottky Diode", Part Number=BAT54C, Pin Count=3, PressFit=No, Sense=No, SMD=Yes, Socket=No
D4: "Diode", Case=SOD-80C, Manufacturer="NXP SEMICONDUCTORS", Power=200mA, Voltage=75V, Author="CERN DEM JLC", Bonding=No, ComponentHeight=1.6mm, Component Type=Standard, CreateDate=30/03/2009, Device=PMLL4148L, HelpURL=\\cern.ch\dfs\Applications\Altium\Datasheets\PMLL4148L.pdf, LatestRevisionDate=09/12/2009, Manufacturer Part Number=PMLL4148L, Mounted=Yes, PackageDescription="SOD80C, MELF Diode, 2-Leads, Body 3.5x1.5mm, IPC Medium Density", Part Description="High-speed switching diodes", Part Number=PMLL4148L, Pin Count=2, PressFit=No, Sense=No, SMD=Yes, Socket=No
D6: library part 1SMB5925BT3G, "Zener Diode", Case=SMB, Manufacturer="ON SEMICONDUCTOR", Power=3W, Voltage=9.1V, Author="CERN DEM BC", Bonding=No, ComponentHeight=2.44mm, Component Type=Standard, CreateDate=24/09/2018, Device=1SMB5924BT3G, HelpURL=\\cern.ch\dfs\Applications\Altium\Datasheets\1SMB5925BT3G.pdf, LatestRevisionDate=24/09/2018, Manufacturer Part Number=1SMB5924BT3G, Mounted=Yes, PackageDescription="DO-214-AA/SMB Diode, Molded Body; 5.40mm L X 3.62mm W X 2.44mm H, IPC Medium Density", Part Description="Plastic Surface Mount Zener Voltage Regulator Diode", Part Number=1SMB5924BT3G, Pin Count=2, PressFit=No, Sense=No, SMD=Yes, Socket=No
FH1: library part FUSH_SCHURTER_0031.7601, Manufacturer=SCHURTER, Manufacturer Part Number=0031.7601, Author="CERN DEM JLC", ComponentHeight=4.4mm, Component Type=Standard, CreateDate=12/09/2012, Family="Fuse Holder", HelpURL=\\cern.ch\dfs\Applications\Altium\Datasheets\FUSH_SCHURTER_0031.7601.pdf, LatestRevisionDate=12/09/2012, Mounted=Yes, PackageDescription="Vertical Fuse Holder For D8.5x H 8.5mm Subminiature Fuses", Part Description="Vertical Fuse Holder For D8.5 x H8.5mm Subminiature Fuses", Part Number=FUSH_SCHURTER_0031.7601, Pin Count=2, PressFit=No, Sense=No, SMD=No, Socket=No
FTG1 FTG2 FTG3: library part FIDUCIAL_TARGET_C100-200, "Fiducial Target", Author="CERN DEM JLC", ComponentHeight=0mm, Component Type="Standard (No BOM)", CreateDate=09/02/2010, Family=Fiducial, HelpURL=Undefined, LatestRevisionDate=04/04/2012, Mounted=No, PackageDescription="Round Fiducial Target, Top Layer, 1.0mm, Top Solder 2.0mm, Keepout =2.0mm", Part Description="Round Fiducial Target, Top Layer, 1.0mm, Top Solder 2.0mm, Keepout =2.0mm", Part Number=FIDUCIAL_TARGET_C100-200, Pin Count=1, Sense=No, SMD=Yes, Socket=No, Status=None
HS1 HS2: library part HSINK_AAVID-THERMALLOY_530002B02500G_v, "Heat Sink With 2 pads", Manufacturer="AAVID THERMALLOY", Manufacturer Part Number=530002B02500G, Author="CERN DEM JLC", ComponentHeight=63.5mm, Component Type=Standard, CreateDate=04/06/2015, HelpURL=\\cern.ch\dfs\Applications\Altium\Datasheets\HSINK_AAVID-THERMALLOY_530002B02500G.pdf, LatestRevisionDate=04/06/2015, Mounted=Yes, PackageDescription="TO-220 Extruded Heat Sink, Rth: 2.6°C/W  - Vertical Mount - Height 63.5mm", Part Description="TO-220 Extruded Heat Sink Rth: 2.6°C/W  - Height 63.5mm", Part Number=HSINK_AAVID-THERMALLOY_530002B02500G_v, Pin Count=2, PressFit=No, Sense=No, SMD=No, Socket=No, Status=None
IC1: "Radiation tolerant 10W Synchronous Step-Down Buck DC/DC converter", Case=QFN32, Manufacturer=CERN, Manufacturer Part Number=FEAST2.1, Author="CERN DEM JLC", Bonding=No, ComponentHeight=0.9mm, Component Type=Standard, CreateDate=25/09/2018, Device=CERN_FEAST2.1, HelpURL=\\cern.ch\dfs\Applications\Altium\Datasheets\CERN_FEAST2.1.pdf, LatestRevisionDate=25/09/2018, Mounted=Yes, PackageDescription="QFN, 0.50mm Pitch, Square; 8 Pin X 8 Pin, 5mm X 5mm X 0.9mm H Body (w/Thermal Tab 3.6 X 3.6mm)", Part Description="Radiation Tolerant 10W Synchronous Step-Down Buck DC/DC converter", Part Number=CERN_FEAST2.1, Pin Count=33, PressFit=No, Sense=No, SMD=Yes, Socket=No
IC2: "Precision Optically Isolated Voltage Sensor", Case=SOIC8, Manufacturer="AVAGO TECHNOLOGIES", Author="CERN DEM JLC", Bonding=No, ComponentHeight=3.6mm, Component Type=Standard, CreateDate=13/08/2013, Device=ACPL-C87B-000E, HelpURL=\\cern.ch\dfs\Applications\Altium\Datasheets\ACPL-C87B-000E.pdf, LatestRevisionDate=13/08/2013, Manufacturer Part Number=ACPL-C87B-000E, Mounted=Yes, PackageDescription="8-Leads Stretched Surface Mount SO Package, Body 6.807x5.859mm, Pitch 1.27mm", Part Description="Precision Optically Isolated Voltage Sensor (±0.5% Gain Tolerance)", Part Number=ACPL-C87B-000E, Pin Count=8, PressFit=No, Sense=No, SMD=Yes, Socket=No
IC3: "High Stability Isolated Error Amplifier", Case=SOIC16, Manufacturer="ANALOG DEVICES", Author="CERN DEM JLC", Bonding=No, ComponentHeight=2.64mm, Component Type=Standard, CreateDate=21/08/2014, Device=ADuM4190ARIZ, HelpURL=\\cern.ch\dfs\Applications\Altium\Datasheets\ADuM4190ARIZ.pdf, LatestRevisionDate=21/08/2014, Manufacturer Part Number=ADuM4190ARIZ, Mounted=Yes, PackageDescription="SOIC, 1.27mm Pitch;16 Pin, 7.49mm W X 10.21mm L X 2.64mm H body, IPC Medium Density", Part Description="200kHz High Stability Isolated Error Amplifier", Part Number=ADuM4190ARIZ, Pin Count=16, PressFit=No, Sense=No, SMD=Yes, Socket=No
IC4: "Dual Operational Amplifier", Case=SOIC8, Manufacturer="TEXAS INSTRUMENTS", Author="CERN DEM JMW", Bonding=No, ComponentHeight=1.75mm, Component Type=Standard, CreateDate=30/08/2016, Device=LM293D, HelpURL=\\cern.ch\dfs\Applications\Altium\Datasheets\LM293D.pdf, LatestRevisionDate=30/08/2016, Manufacturer Part Number=LM293D, Mounted=Yes, PackageDescription="SOIC 8, Pitch 1.27mm, Body 4x5mm, IPC Medium Density", Part Description="Dual Differential Comparator", Part Number=LM293D, Pin Count=8, PressFit=No, Sense=No, SMD=Yes, Socket=No
IC5: "TimerBlox: Monostable Pulse Generator (One Shot)", Case=SOT23-6, Manufacturer="LINEAR TECHNOLOGY", Author="CERN DEM JLC", Bonding=No, ComponentHeight=1mm, Component Type=Standard, CreateDate=05/03/2019, Device=LTC6993CS6-1#TRPBF, HelpURL=\\cern.ch\dfs\Applications\Altium\Datasheets\LTC6993CS6-1#TRPBF.pdf, LatestRevisionDate=05/03/2019, Manufacturer Part Number=LTC6993CS6-1#TRPBF, Mounted=Yes, PackageDescription="SOT23, 0.95mm pitch; 6 pin, 1.625mm W X 2.90mm L X 1.00mm H body, IPC Medium Density", Part Description="TimerBlox: Monostable Pulse Generator (One Shot)", Part Number=LTC6993CS6-1#TRPBF, Pin Count=6, PressFit=No, Sense=No, SMD=Yes, Socket=No
IC6: "Single 2-Input AND Gate", Case=SOT353, Manufacturer="NXP SEMICONDUCTORS", Author="CERN DEM JLC", Bonding=No, ComponentHeight=1.1mm, Component Type=Standard, CreateDate=31/08/2010, Device=74AHC1G08GW, HelpURL=\\cern.ch\dfs\Applications\Altium\Datasheets\74AHC1G08GW.pdf, LatestRevisionDate=31/08/2010, Manufacturer Part Number=74AHC1G08GW, Mounted=Yes, PackageDescription="SOT353, SOT, 0.65mm Pitch, 5 pin, 1.25mm W X 2.05mm L X 1.10mm H, IPC Medium Density", Part Description="Single 2-Input AND Gate", Part Number=74AHC1G08GW, Pin Count=5, PressFit=No, Sense=No, SMD=Yes, Socket=No
IC7: "40V 5A Gate Driver", Case=SOT23-6, Manufacturer="DIODES INCORPORATED", Author="CERN DEM JLC", Bonding=No, ComponentHeight=1.4mm, Component Type=Standard, CreateDate=05/03/2019, Device=ZXGD3003E6TA, HelpURL=\\cern.ch\dfs\Applications\Altium\Datasheets\ZXGD3003E6TA.pdf, LatestRevisionDate=05/03/2019, Manufacturer Part Number=ZXGD3003E6TA, Mounted=Yes, PackageDescription="SOT23, 0.95mm Pitch; 6 Pin, 1.60mm W X 3.00mm L X 1.40mm H Body, IPC Medium Density", Part Description="40V 5A Gate Driver", Part Number=ZXGD3003E6TA, Pin Count=6, PressFit=No, Sense=No, SMD=Yes, Socket=No
IC8: "3-Terminal Regulator 1=Adj 2=OUT 3=IN 4=OUT", Case=SOT-223, Manufacturer="TEXAS INSTRUMENTS", Author="CERN DEM JLC", Bonding=No, ComponentHeight=1.8mm, Component Type=Standard, CreateDate=02/12/2008, Device=LM317EMP, HelpURL=\\cern.ch\dfs\Applications\Altium\Datasheets\LM317EMP.pdf, LatestRevisionDate=16/09/2014, Manufacturer Part Number=LM317EMP, Mounted=Yes, PackageDescription="SOT223, 2.30mm pitch; 3 pin, 3.70mm W X 6.70mm L, IPC Medium Density", Part Description="3-Terminal 1.2V To 37V 1A Positive Adjustable Regulator", Part Number=LM317EMP, Pin Count=4, PressFit=No, Sense=No, SMD=Yes, Socket=No, Status="Not Recommended"
IC9 IC11: "3-Terminal Regulator 1=OUT 2=GND 3=IN", Case=SOT89, Manufacturer="ST MICROELECTRONICS", Author="CERN DEM JLC", Bonding=No, ComponentHeight=1.6mm, Component Type=Standard, CreateDate=10/10/2011, Device=L78L05ACUTR, HelpURL=\\cern.ch\dfs\Applications\Altium\Datasheets\L78L05ACUTR.pdf, LatestRevisionDate=06/12/2011, Manufacturer Part Number=L78L05ACUTR, Mounted=Yes, PackageDescription="SOT89-3, 3-Leads, Body 2.44x4.5mm", Part Description="5V 100mA Positive Voltage Regulator", Part Number=L78L05ACUTR, Pin Count=4, PressFit=No, Sense=No, SMD=Yes, Socket=No
IC10: "3-Terminal Regulator 1=GND 2=IN 3=OUT 4=IN", Case=SOT89, Manufacturer="ST MICROELECTRONICS", Author="CERN DEM JLC", Bonding=No, ComponentHeight=1.6mm, Component Type=Standard, CreateDate=29/03/2012, Device=L79L05ACUTR, HelpURL=\\cern.ch\dfs\Applications\Altium\Datasheets\L79L05ACUTR.pdf, LatestRevisionDate=29/03/2012, Manufacturer Part Number=L79L05ACUTR, Mounted=Yes, PackageDescription="SOT89-3, 3-Leads, Body 2.44x4.5mm", Part Description="5V 100mA Negative Voltage Regulator", Part Number=L79L05ACUTR, Pin Count=4, PressFit=No, Sense=No, SMD=Yes, Socket=No
J1 J2 J3: library part JST_B3B-XH-A(LF)(SN), "Connector 3 Male", Manufacturer="JST (JAPAN SOLDERLESS TERMINALS)", Manufacturer Part Number=B3B-XH-A(LF)(SN), Author="CERN DEM JLC", ComponentHeight=7mm, Component Type=Standard, CreateDate=14/08/2014, Family="Header 3", HelpURL=\\cern.ch\dfs\Applications\Altium\Datasheets\JST_B3B-XH-A(LF)(SN).pdf, LatestRevisionDate=14/08/2014, Mounted=Yes, Part Description="3 Contacts, 2.5mm Pitch, Top Entry Type Shrouded Header", Part Number=JST_B3B-XH-A(LF)(SN), Pin Count=3, PressFit=No, Sense=No, SMD=No, Socket=No, Status=None
J4 J5: library part PHOENIX_1755736, "Connector 2 Male", Manufacturer="PHOENIX CONTACT", Manufacturer Part Number="1755736 (MSTBVA 2,5/2-G-5,08)", Author="CERN DEM JLC", ComponentHeight=12mm, Component Type=Standard, CreateDate=07/12/2010, HelpURL=\\cern.ch\dfs\Applications\Altium\Datasheets\PHOENIX_1755736.pdf, LatestRevisionDate=07/12/2010, Mounted=Yes, Part Description="12A, 250V, Pitch 5.08mm, 2 Positions Header", Part Number=PHOENIX_1755736, Pin Count=2, PressFit=No, Sense=No, SMD=No, Socket=No, Status=None
J6: library part JST_B6B-XH-A(LF)(SN), "Connector 6 Male", Manufacturer="JST (JAPAN SOLDERLESS TERMINALS)", Manufacturer Part Number=B6B-XH-A(LF)(SN), Author="CERN DEM JLC", ComponentHeight=7mm, Component Type=Standard, CreateDate=26/06/2014, Family="Header 6", HelpURL=\\cern.ch\dfs\Applications\Altium\Datasheets\JST_B6B-XH-A(LF)(SN).pdf, LatestRevisionDate=26/06/2014, Mounted=Yes, Part Description="6 Contacts, 2.5mm Pitch, Top Entry Type Shrouded Header", Part Number=JST_B6B-XH-A(LF)(SN), Pin Count=6, PressFit=No, Sense=No, SMD=No, Socket=No, Status=None
L1: library part IND_10UH_20%_BOURNS_SRP1038A, "Inductor", Manufacturer=BOURNS, Manufacturer Part Number=SRP1038A-100M, Power=7.5A, Resistance=0.027R, Tolerance=±20%, Author="CERN DEM MR", ComponentHeight=4mm, Component Type=Standard, CreateDate=21/09/2018, HelpURL=\\cern.ch\dfs\Applications\Altium\Datasheets\IND_BOURNS_SRP1038A.pdf, LatestRevisionDate=21/09/2018, Mounted=Yes, Part Description="Shielded SMD Power Inductor", Part Number=IND_10UH_20%_BOURNS_SRP1038A, Pin Count=2, Sense=No, SMD=Yes, Socket=No, Status=None
LD1 LD5: library part LED_KINGBRIGHT_KPH-1608QBC-D, "LED Blue 1C 2A", Manufacturer=KINGBRIGHT, Manufacturer Part Number=KPH-1608QBC-D, Author="CERN DEM JLC", Bonding=No, Color=Blue, ComponentHeight=0.65mm, Component Type=Standard, CreateDate=03/07/2017, HelpURL=\\cern.ch\dfs\Applications\Altium\Datasheets\LED_KINGBRIGHT_KPH-1608QBC-D.pdf, LatestRevisionDate=03/07/2017, Mounted=Yes, PackageDescription="SMT Blue LED, Case 0603, Body L 1.6 x W 0.8mm H 0.65mm", Part Description="SMD Blue LED, Case 1.6mmX0.8mm(0603), 0.65mm Thickness", Part Number=LED_KINGBRIGHT_KPH-1608QBC-D, Pin Count=2, PressFit=No, Sense=No, SMD=Yes, Socket=No
LD2 LD3 LD4: library part LED_KINGBRIGHT_KPH-1608CGCK, "LED Green 1C 2A", Manufacturer=KINGBRIGHT, Manufacturer Part Number=KPH-1608CGCK, Author="CERN DEM JLC", Bonding=No, Color=Green, ComponentHeight=0.65mm, Component Type=Standard, CreateDate=03/07/2017, HelpURL=\\cern.ch\dfs\Applications\Altium\Datasheets\LED_KINGBRIGHT_KPH-1608CGCK.pdf, LatestRevisionDate=03/07/2017, Mounted=Yes, PackageDescription="SMT Green LED, Case 0603, Body L 1.6 x W 0.8mm H 0.65mm", Part Description="SMD Green LED, Case 1.6mmX0.8mm(0603), 0.65mm Thickness", Part Number=LED_KINGBRIGHT_KPH-1608CGCK, Pin Count=2, PressFit=No, Sense=No, SMD=Yes, Socket=No
P1: library part TRIM_11T_100K_VISHAY_TSM4YL104KR05, "Trimming Potentiometer", Case=TSM4YL, Manufacturer="VISHAY SFERNICE", Manufacturer Part Number=TSM4YL104KR05, Power=0.25W, Tolerance=±10%, Author="CERN DEM JLC", ComponentHeight=5.3mm, Component Type=Standard, CreateDate=11/04/2013, HelpURL=\\cern.ch\dfs\Applications\Altium\Datasheets\TRIM_VISHAY_TSM4YL.pdf, LatestRevisionDate=11/04/2013, Mounted=Yes, Part Description="11 Turns SMD Trimming Potentiometer (Top Adjust)", Part Number=TRIM_11T_100K_VISHAY_TSM4YL104KR05, Pin Count=3, PressFit=No, Sense=No, SMD=Yes, Socket=No, TC=±100ppm/°C
R1 R7 R16 R21 R24: library part R0805_220K_1%_0.125W_100PPM, "Resistor - 1%", Case=0805, Manufacturer=GENERIC, Manufacturer1 ComponentHeight=0.6mm, Manufacturer1 Example="NIC COMPONENT", Manufacturer1 Part Number=NRC10F2203TRF, Power=0.125W, Tolerance=±1%, Author="CERN DEM JLC", Component Type=Standard, CreateDate=03/12/2007, HelpURL=\\cern.ch\dfs\Applications\Altium\Datasheets\R0805_NIC_NRC.pdf, LatestRevisionDate=13/03/2008, Manufacturer Part Number=R0805_220K_1%_0.125W_100PPM, Mounted=Yes, Part Description="General Purpose Thick Film Chip Resistor", Part Number=R0805_220K_1%_0.125W_100PPM, Pin Count=2, PressFit=No, Sense=No, SMD=Yes, Socket=No, Status=Preferred, TC=±100ppm/°C
R2 R27: library part R0805_100K_1%_0.125W_100PPM, "Resistor - 1%", Case=0805, Manufacturer=GENERIC, Manufacturer1 ComponentHeight=0.6mm, Manufacturer1 Example="NIC COMPONENT", Manufacturer1 Part Number=NRC10F1003TRF, Power=0.125W, Tolerance=±1%, Author="CERN DEM JLC", Component Type=Standard, CreateDate=03/12/2007, HelpURL=\\cern.ch\dfs\Applications\Altium\Datasheets\R0805_NIC_NRC.pdf, LatestRevisionDate=13/03/2008, Manufacturer Part Number=R0805_100K_1%_0.125W_100PPM, Mounted=Yes, Part Description="General Purpose Thick Film Chip Resistor", Part Number=R0805_100K_1%_0.125W_100PPM, Pin Count=2, PressFit=No, Sense=No, SMD=Yes, Socket=No, Status=Preferred, TC=±100ppm/°C
R3: library part R0805_18K_1%_0.125W_100PPM, "Resistor - 1%", Case=0805, Manufacturer=GENERIC, Manufacturer1 ComponentHeight=0.6mm, Manufacturer1 Example="NIC COMPONENT", Manufacturer1 Part Number=NRC10F1802TRF, Power=0.125W, Tolerance=±1%, Author="CERN DEM JLC", Component Type=Standard, CreateDate=03/12/2007, HelpURL=\\cern.ch\dfs\Applications\Altium\Datasheets\R0805_NIC_NRC.pdf, LatestRevisionDate=13/03/2008, Manufacturer Part Number=R0805_18K_1%_0.125W_100PPM, Mounted=Yes, Part Description="General Purpose Thick Film Chip Resistor", Part Number=R0805_18K_1%_0.125W_100PPM, Pin Count=2, PressFit=No, Sense=No, SMD=Yes, Socket=No, Status=Preferred, TC=±100ppm/°C
R4 R9 R19 R23: library part R0805_10K_1%_0.125W_100PPM, "Resistor - 1%", Case=0805, Manufacturer=GENERIC, Manufacturer1 ComponentHeight=0.6mm, Manufacturer1 Example="NIC COMPONENT", Manufacturer1 Part Number=NRC10F1002TRF, Power=0.125W, Tolerance=±1%, Author="CERN DEM JLC", Component Type=Standard, CreateDate=03/12/2007, HelpURL=\\cern.ch\dfs\Applications\Altium\Datasheets\R0805_NIC_NRC.pdf, LatestRevisionDate=13/03/2008, Manufacturer Part Number=R0805_10K_1%_0.125W_100PPM, Mounted=Yes, Part Description="General Purpose Thick Film Chip Resistor", Part Number=R0805_10K_1%_0.125W_100PPM, Pin Count=2, PressFit=No, Sense=No, SMD=Yes, Socket=No, Status=Preferred, TC=±100ppm/°C
R5 R10: library part R0805_3K3_0.1%_0.125W_25PPM, "Resistor - 0.1%", Case=0805, Manufacturer=GENERIC, Manufacturer1 ComponentHeight=0.6mm, Manufacturer1 Example=PANASONIC, Manufacturer1 Part Number=ERA6AEB332V, Power=0.125W, Tolerance=±0.1%, Author="CERN DEM JLC", Component Type=Standard, CreateDate=07/06/2018, HelpURL=\\cern.ch\dfs\Applications\Altium\Datasheets\R0805_PANASONIC_ERA.pdf, LatestRevisionDate=07/06/2018, Manufacturer Part Number=R0805_3K3_0.1%_0.125W_25PPM, Mounted=Yes, Part Description="Thin Film Chip Resistor", Part Number=R0805_3K3_0.1%_0.125W_25PPM, Pin Count=2, PressFit=No, Sense=No, SMD=Yes, Socket=No, Status="Not Recommended", TC=±25ppm
R6: library part R0805_1M_0.1%_0.1W_25PPM, "Resistor - 0.1%", Case=0805, Manufacturer=GENERIC, Manufacturer1 ComponentHeight=0.65mm, Manufacturer1 Example="TT ELECTRONICS", Manufacturer1 Part Number=PCF0805R-1M0BT1, Power=0.1W, Tolerance=±0.1%, Author="CERN DEM JLC", Component Type=Standard, CreateDate=17/11/2008, HelpURL="\\cern.ch\dfs\Applications\Altium\Datasheets\R0805_TT ELECTRONICS_PCF.pdf", LatestRevisionDate=25/10/2018, Manufacturer Part Number=R0805_1M_0.1%_0.1W_25PPM, Mounted=Yes, Part Description="Precision Surface Mount Resistor", Part Number=R0805_1M_0.1%_0.1W_25PPM, Pin Count=2, PressFit=No, Sense=No, SMD=Yes, Socket=No, Status="Not Recommended", TC=±25ppm/°C
R8 R11: library part R0805_390K_1%_0.125W_100PPM, "Resistor - 1%", Case=0805, Manufacturer=GENERIC, Manufacturer1 ComponentHeight=0.6mm, Manufacturer1 Example="NIC COMPONENT", Manufacturer1 Part Number=NRC10F3903TRF, Power=0.125W, Tolerance=±1%, Author="CERN DEM JLC", Component Type=Standard, CreateDate=03/12/2007, HelpURL=\\cern.ch\dfs\Applications\Altium\Datasheets\R0805_NIC_NRC.pdf, LatestRevisionDate=13/03/2008, Manufacturer Part Number=R0805_390K_1%_0.125W_100PPM, Mounted=Yes, Part Description="General Purpose Thick Film Chip Resistor", Part Number=R0805_390K_1%_0.125W_100PPM, Pin Count=2, PressFit=No, Sense=No, SMD=Yes, Socket=No, Status=Preferred, TC=±100ppm/°C
R12: library part R0805_68K_0.1%_0.125W_25PPM, "Resistor - 0.1%", Case=0805, Manufacturer=GENERIC, Manufacturer1 ComponentHeight=0.6mm, Manufacturer1 Example=PANASONIC, Manufacturer1 Part Number=ERA6AEB683V, Power=0.125W, Tolerance=±0.1%, Author="CERN DEM JLC", Component Type=Standard, CreateDate=23/10/2013, HelpURL=\\cern.ch\dfs\Applications\Altium\Datasheets\R0805_PANASONIC_ERA.pdf, LatestRevisionDate=23/10/2013, Manufacturer Part Number=R0805_68K_0.1%_0.125W_25PPM, Mounted=Yes, Part Description="Thin Film Chip Resistor", Part Number=R0805_68K_0.1%_0.125W_25PPM, Pin Count=2, PressFit=No, Sense=No, SMD=Yes, Socket=No, Status="Not Recommended", TC=±25ppm
R13 R14: library part R0805_20K_1%_0.125W_100PPM, "Resistor - 1%", Case=0805, Manufacturer=GENERIC, Manufacturer1 ComponentHeight=0.6mm, Manufacturer1 Example="NIC COMPONENT", Manufacturer1 Part Number=NRC10F2002TRF, Power=0.125W, Tolerance=±1%, Author="CERN DEM JLC", Component Type=Standard, CreateDate=03/12/2007, HelpURL=\\cern.ch\dfs\Applications\Altium\Datasheets\R0805_NIC_NRC.pdf, LatestRevisionDate=13/03/2008, Manufacturer Part Number=R0805_20K_1%_0.125W_100PPM, Mounted=Yes, Part Description="General Purpose Thick Film Chip Resistor", Part Number=R0805_20K_1%_0.125W_100PPM, Pin Count=2, PressFit=No, Sense=No, SMD=Yes, Socket=No, Status=Preferred, TC=±100ppm/°C
R15: library part R0805_33K_0.1%_0.125W_25PPM, "Resistor - 0.1%", Case=0805, Manufacturer=GENERIC, Manufacturer1 ComponentHeight=0.6mm, Manufacturer1 Example=PANASONIC, Manufacturer1 Part Number=ERA6AEB333V, Power=0.125W, Tolerance=±0.1%, Author="CERN DEM JLC", Component Type=Standard, CreateDate=04/06/2015, HelpURL=\\cern.ch\dfs\Applications\Altium\Datasheets\R0805_PANASONIC_ERA.pdf, LatestRevisionDate=04/06/2015, Manufacturer Part Number=R0805_33K_0.1%_0.125W_25PPM, Mounted=Yes, Part Description="Thin Film Chip Resistor", Part Number=R0805_33K_0.1%_0.125W_25PPM, Pin Count=2, PressFit=No, Sense=No, SMD=Yes, Socket=No, Status="Not Recommended", TC=±25ppm
R17: library part R0805_59K_1%_0.125W_100PPM, "Resistor - 1%", Case=0805, Manufacturer=VISHAY, Manufacturer1 ComponentHeight=0.6mm, Manufacturer1 Part Number=CRCW080559K0FKEA, Power=0.125W, Tolerance=±1%, Author="CERN DEM JLC", Component Type=Standard, CreateDate=18/04/2013, HelpURL=\\cern.ch\dfs\Applications\Altium\Datasheets\R2512_VISHAY_CRCW0805.pdf, LatestRevisionDate=18/04/2013, Manufacturer1 Example=VISHAY, Manufacturer Part Number=R0805_59K_1%_0.125W_100PPM, Mounted=Yes, Part Description="Thick Film Chip Resistor", Part Number=R0805_59K_1%_0.125W_100PPM, Pin Count=2, PressFit=No, Sense=No, SMD=Yes, Socket=No, Status=None, TC=±100ppm/°C
R18: library part R0805_10M_1%_0.125W_100PPM, "Resistor - 1%", Case=0805, Manufacturer=GENERIC, Manufacturer1 ComponentHeight=0.6mm, Manufacturer1 Example="NIC COMPONENT", Manufacturer1 Part Number=NRC10F1005TRF, Power=0.125W, Tolerance=±1%, Author="CERN DEM MR", Component Type=Standard, CreateDate=18/02/2016, HelpURL=\\cern.ch\dfs\Applications\Altium\Datasheets\R0805_NIC_NRC.pdf, LatestRevisionDate=18/02/2016, Manufacturer Part Number=R0805_10M_1%_0.125W_100PPM, Mounted=Yes, Part Description="General Purpose Thick Film Chip Resistor", Part Number=R0805_10M_1%_0.125W_100PPM, Pin Count=2, PressFit=No, Sense=No, SMD=Yes, Socket=No, Status=Preferred, TC=±100ppm/°C